# Altium PCB 606-100835.pcbdoc (part 2 of 3)
Units mm, origin at the board's own origin, x right, y up, seen from the top; angles counter-clockwise.
Board outline 27 x 28.35 mm, 6 copper layers (Layer 1, Layer 2, Layer 3, Layer 4, Layer 5, Layer 6), stack 1.518 mm thick; 145 components, 197 nets, 755 pads, 438 vias.
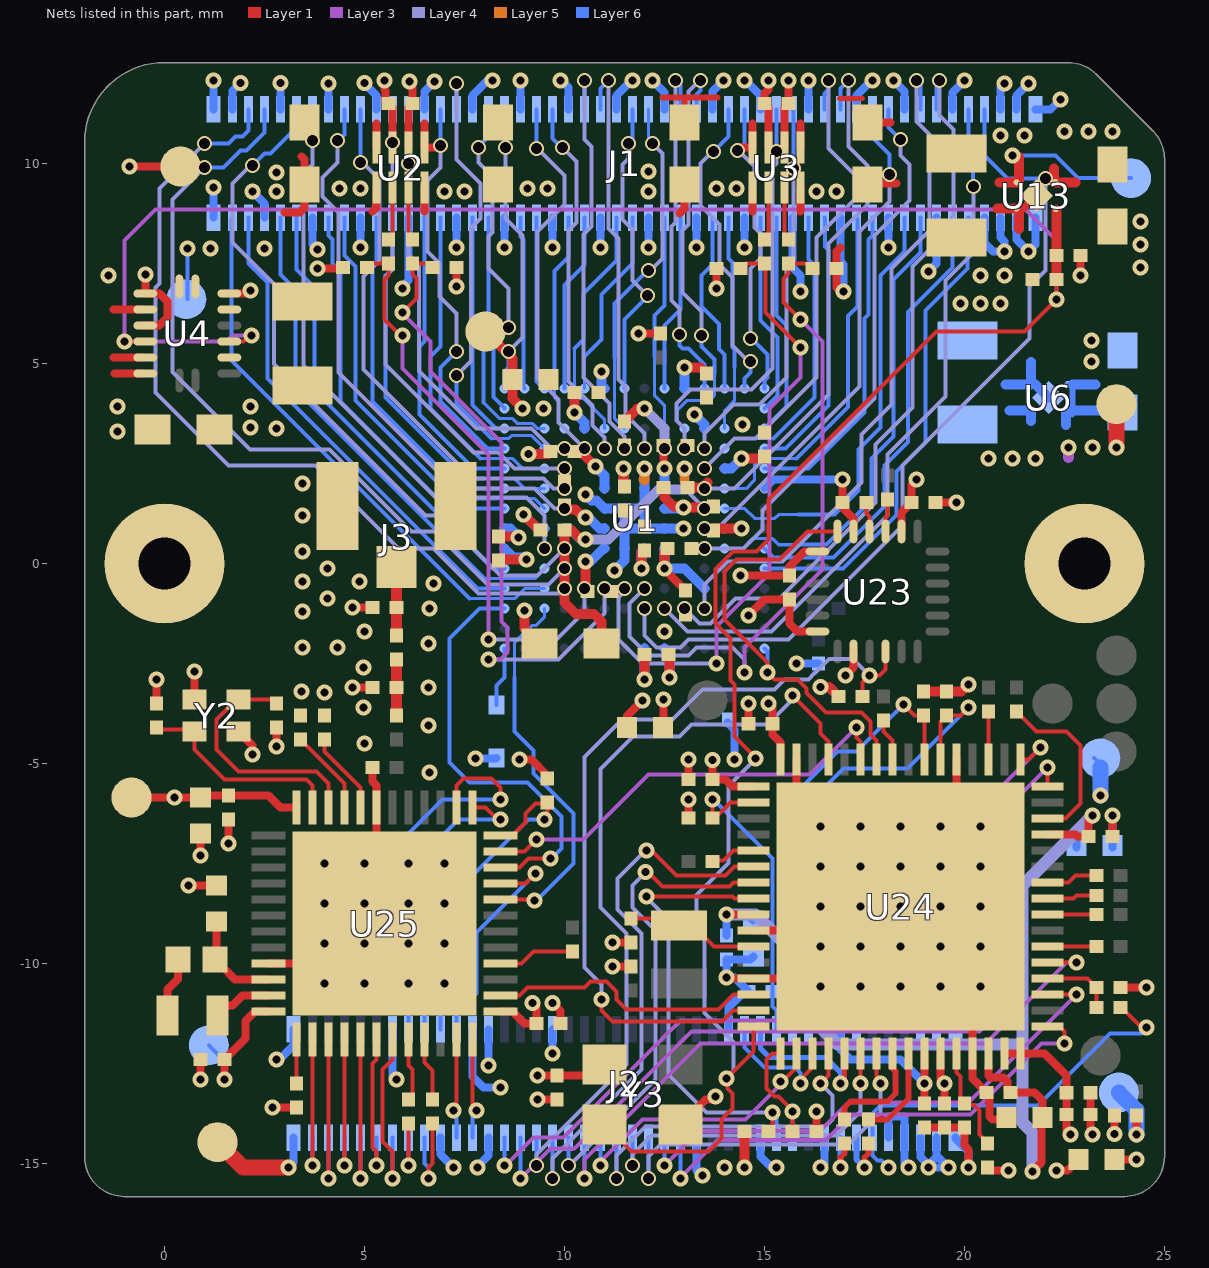
[diagram p6: the nets of this part, all layers, seen from the top]

## Via types
v1: diameter 0.4, hole 0.2, Layer 1 to Layer 6, tented both sides, 358 vias
v2: diameter 0.381, hole 0.279, Layer 4 to Layer 6, tented bottom, 80 vias

## Nets (pads, with @x,y where several pads share a name; then routed paths per layer and width w, separated by ;. In a path a pad name is that pad's centre, name@x,y a point inside that pad or via, vN(x,y) a via of type N, cw(c..) or ccw(c..) an arc to the next point about the centre after c; other vN are vias at no path point) (continued)
GND: C1.1 C2.2 C3.2 C4.2 C5.2 C6.2 C7.2 C8.2 C9.2 C10.2 C11.2 C12.1 C13.2 C14.2 C15.2 C16.2 C17.1 C18.2 C21.1 C37.2 C38.2 C39.2 C40.2 C41.2 C42.2 C45.2 C46.2 C47.2 C48.2 C49.2 C50.2 C51.2 C52.2 C57.2 C74.1 C75.1 C76.2 C77.2 C78.1 C79.1 C80.1 C81.2 C82.1 C83.2 C84.2 C85.1 C86.2 C87.1 C88.2 C89.2 C90.2 C91.2 C92.1 C93.2 C94.1 C95.2 C96.1 C97.2 C98.2 C99.2 C102.2 C103.2 C116.2 C117.2 J1.5 J1.11 J1.17 J1.23 J1.29 J1.35 J1.41 J1.47 J1.53 J1.59 J1.65 J1.71 J1.77 J1.83 J1.89 J1.95 J1.97 J1.98 J1.99 J1.100 J1.101 J1.102 J1.103 J1.104 J2.12 J2.17 J2.23 J2.24 J2.32 J2.49 J2.54 J2.57 J2.65 J2.70 J2.73 J2.75 J2.78 J2.80 J2.81 J2.82 J2.83 J2.84 J3.2 J3.3 M1.1 M2.1 R1.2 R2.2 R3.2 R4.2 R5.2 R12.2 R53.2 R119.2 TP13.1 TP14.1 U1.A9 U1.F1 U1.F7 U1.G7 U1.G8 U1.G9 U1.H6 U1.H7 U1.H8 U1.J8 U1.J14 U1.L3 U1.P6 U2.7 U3.7 U4.2 U4.6 U4.9 U4.11 U6.2 U6.5 U13.2 U13.5 U23.11 U23.18 U23.20 U24.10 U24.13 U24.29 U24.53 U24.63 U24.65 U25.31 U25.45 U25.49 Y2.2 Y2.4 Y3.2 | length 114.2
  Layer 1 w0.1: v1@-0.581,7.225 v1(-0.475,7.225) ; U4.9@-0.48,6.75 U4.9@-0.475,6.755 ; C12.1@12.465,-4.1 C12.1@12.475,-4.09 ; C50.2@19.5,8.35 C50.2@19.75,8.35
  Layer 1 w0.19: v1(5.5,12.075) 5.5,11.85 5.525,11.825 5.525,11.575 C116.2@5.6,11.5 5.7,11.4 U2.7@5.7,10.4 ; U3.7@15.1,10.4 15.1,11.4 C117.2@15,11.5 15,11.75 15.1,11.85 v1(15.1,12.075)
  Layer 1 w0.2: U4.11@-0.575,5.95 U4.11@-0.48,5.95 -0.125,5.95 0.075,6.15 0.075,6.55 -0.125,6.75 U4.9@-0.48,6.75 ; U4.9@-0.475,6.755 v1(-0.475,7.225) ; C103.2@-0.2,-3.5 v1(-0.2,-2.9) ; v1(0.6,-8.05) C90.2@1.3,-8.05 ; Y2.2@0.75,-3.4 v1(0.75,-2.7) ; v1(0.9,-12.9) C94.1@0.9,-12.4 ; v1(0.9,-7.3) C91.2@0.9,-6.75 ; U4.6@1.525,6.75 U4.6@1.62,6.75 2.075,6.75 v1(2.15,6.825) ; v1(1.6,-7) C96.1@1.6,-6.4 ; Y2.4@1.85,-4.2 2.2,-4.55 v1(2.2,-4.775) ; U25.45@2.6,-10 U25.49@3.5,-10 ; v1(2.7,-13.6) C93.2@3.3,-13.6 ; v1(2.8,-4.575) C102.2@2.8,-4.1 ; 3,8.775 3.375,8.775 3.5,8.9 C47.2@3.5,9.475 3.5,10.1 3.425,10.175 ; v1(3.825,7.375) 4.432,7.375 R2.2@4.457,7.4 ; v1(4.7,-3.1) C99.2@5.2,-3.1 ; v1(4.7,-1.1) C57.2@5.2,-1.1 ; C98.2@5.2,-5.1 5.2,-5.45 5.3,-5.55 U25.31@5.3,-6.1 U25.49@5.3,-7.25 ; v1@7.343,6.9 7.3,6.943 7.3,7.357 R3.2@7.343,7.4 ; v1(9.325,-13.4) C45.2@9.811,-13.4 ; v1(9.705,-10.988) 9.9,-11.183 C92.1@9.9,-11.5 ; v1(11.2,-10.075) 11.609,-10.075 11.634,-10.1 C89.2@11.659,-10.075 ; v1(11.2,-9.475) 11.609,-9.475 11.634,-9.5 C88.2@11.659,-9.475 ; v1(11.85,5.75) R1.2@12.4,5.75 ; C12.1@12.475,-4.09 v1(12.475,-3.4) ; 12.875,8.75 13,8.875 C51.2@13,9.475 ; Y3.2@12.906,-14.025 Y3.2@12.956,-13.975 ; Y3.2@12.956,-14.125 Y3.2@12.956,-13.975 ; Y3.2@12.956,-13.969 Y3.2@12.956,-13.975 ; C78.1@13.1,-5.4 v1(13.1,-4.9) ; v1@13.75,-13.3 v1(13.775,-13.325) 13.7,-13.4 13.531,-13.4 Y3.2@12.956,-13.975 ; v1(13.8,6.876) R4.2@13.8,7.375 ; v1(14.05,-10.35) 14.075,-10.375 U24.13@14.725,-10.375 U24.65@15.484,-10.375 ; C85.1@14.599,-4.005 v1(14.599,-3.5) ; v1(14.6,-1.3) 14.999,-0.901 C75.1@15.625,-0.901 15.625,-1.5 15.825,-1.7 U23.18@16.2,-1.7 ; U24.10@14.725,-9.175 U24.65@15.5,-9.175 ; U24.65@15.8,-5.7 U24.63@15.8,-4.9 ; 16.9,7.9 16.8,7.8 R5.2@16.8,7.375 16.8,6.9 16.9,6.8 v1(16.975,6.8) ; v1(16.95,2.1) C76.2@16.95,1.525 16.95,1.4 17.225,1.125 U23.11@17.225,0.8 ; v1(17.025,-2.8) 17.225,-2.6 U23.20@17.225,-2.2 ; C48.2@17.575,9.6 17.675,9.5 18.3,9.5 ; v1(18.4,-8.575) v1(19.4,-9.575) 20.2,-10.375 U24.29@20.2,-12.25 20.2,-12.875 C84.2@20.55,-13.225 20.625,-13.3 20.625,-13.825 20.7,-13.9 C81.2@21,-13.9 ; C87.1@19,-14.1 C79.1@19.5,-14.1 C83.2@20,-14.1 20,-14.55 20.1,-14.65 v1(20.1,-15.1) ; C74.1@19.275,1.525 v1(19.8,1.525) ; U24.65@19.8,-5.6 U24.53@19.8,-4.9 ; C81.2@21.05,-13.85 C81.2@21,-13.9 ; C81.2@21.075,-13.975 C81.2@21,-13.9 ; 21.475,8.875 U13.5@21.8,9.2 ; C82.1@23.15,-13.231 C80.1@23.15,-13.775 23.15,-14.225 v1(23.2,-14.275) ; C86.2@23.7,-6.825 v1(23.7,-6.3) ; C77.2@23.75,-14.899 v1(24.3,-14.899) ; R119.2@23.9,-10.6 v1@24.425,-10.6 ; v1(24.3,-14.275) C18.2@24.3,-13.8
  Layer 1 w0.25: C14.2@8.35,0.075 8.375,0.075 8.4,0.1 v1(9.05,0.1) ; v1(9.1,2.737) 9.587,2.737 C9.2@9.65,2.8 ; v1@10.85,4.775 10.875,4.8 v1(10.925,4.8) ; C4.2@12.6,-2.275 12.625,-2.3 v1(12.625,-2.85) ; C2.2@13.075,1.9 13.45,1.9 13.575,2.025 ; 20.825,8.875 21.365,8.875 21.365,8.365
  Layer 1 w0.4: TP14.1@1.324,-14.466 1.956,-15.099 v1(3.1,-15.099)
  Layer 5 w0.25: 12,2.075 11.975,2.1 12,2.125 v1(12,2.375) ; 13,2.075 v1(13,2.375)
  Layer 6 w0.1: U6.2@21.665,4.475 21.775,4.475
  Layer 6 w0.2: J1.101@1.225,8.645 v1(1.225,9.4) ; J1.102@1.225,11.355 v1(1.225,12.075) ; v1(2.2,9.3) 2.5,9 J1.5@2.5,8.645 ; v1(2.8,-12.4) 2.875,-12.4 3.225,-12.05 J2.82@3.225,-11.645 ; v1(3.1,-15.099) 3.225,-14.974 J2.81@3.225,-14.355 ; J1.11@3.7,8.645 3.7,7.975 v1(3.825,7.85) ; v1(4.9,7.9) J1.17@4.9,8.645 ; J2.12@5.7,-11.645 5.7,-12.8 v1(5.8,-12.9) ; v1(5.95,6.875) 5.95,6.95 5.963,6.937 6.1,7.075 J1.23@6.1,8.645 ; J2.17@6.9,-14.355 6.9,-14.775 v1(7.225,-15.1) ; v1(7.3,7.9) J1.29@7.3,8.645 ; v1(7.825,-15.1) 7.825,-15.075 8.1,-14.8 J2.23@8.1,-14.355 ; v1(8.1,-12.55) J2.24@8.1,-11.645 ; v1(8.5,7.9) J1.35@8.5,8.645 ; v1@8.5,7.95 J1.35@8.5,8.654 ; v1(9.7,-12.25) J2.32@9.7,-11.645 ; v1(9.7,7.9) J1.41@9.7,8.645 ; v1(10.9,7.9) J1.47@10.9,8.645 ; v1(12.1,7.9) J1.53@12.1,8.645 ; J2.49@13.3,-14.355 13.3,-15.175 13.425,-15.3 v1(13.45,-15.3) ; v1(13.3,7.9) J1.59@13.3,8.645 ; J2.54@14.1,-11.645 14.1,-11.1 14.5,-10.7 C52.2@14.6,-10.7 14.25,-10.35 v1(14.05,-10.35) C16.2@14.05,-9.9 14.65,-9.9 C21.1@14.725,-9.825 ; v1(14.5,7.9) J1.65@14.5,8.645 ; J2.57@14.9,-14.355 14.9,-14.825 15.174,-15.099 v1(15.3,-15.099) ; U1.P6@15,1.875 15.225,2.1 v1(16.95,2.1) ; J1.71@15.7,8.645 15.7,7.4 15.9,7.2 v1(15.9,6.8) ; v1(15.8,-2.5) R12.2@16.35,-2.5 ; v1(16.4,-15.099) 16.5,-14.999 J2.65@16.5,-14.355 ; J1.77@16.9,8.645 16.9,7.55 16.975,7.475 v1(16.975,6.8) ; J2.70@17.3,-11.645 17.3,-11 17.4,-10.9 v1(17.4,-10.575) ; J2.73@18.1,-14.355 18.1,-13.83 18.5,-13.83 J2.75@18.5,-14.355 18.5,-15 v1(18.6,-15.1) ; v1(18.1,7.9) J1.83@18.1,8.645 ; J2.78@18.9,-11.645 18.9,-11.2 19,-11.1 19.2,-11.1 ; v1(19.1,7.3) 19.3,7.5 J1.89@19.3,8.645 ; J2.80@19.3,-11.645 19.3,-11.2 19.2,-11.1 ; v1(19.4,-10.575) 19.4,-10.9 19.2,-11.1 ; J2.83@19.775,-14.355 19.775,-14.375 20.1,-14.7 v1(20.1,-15.1) ; J2.84@19.775,-11.645 19.775,-11.2 v1(20.4,-10.575) ; J1.95@20.5,8.645 20.5,8.012 20.712,7.8 v1(21,7.8) 21,8.05 20.9,8.15 J1.97@20.9,8.645 ; J1.98@20.9,11.355 20.9,11.9 v1(21,12) ; J1.99@21.3,8.645 21.3,8.1 v1(21.6,7.8) 21.775,7.975 J1.103@21.775,8.645 ; J1.100@21.3,11.355 21.3,11.7 v1(21.6,12) ; J1.104@21.775,11.355 22.155,11.355 v1(22.4,11.6) ; C17.1@23.7,-7.1 C17.1@23.7,-7.05 v1(23.7,-6.3)
  Layer 6 w0.25: U1.A9@8.5,0.375 8.725,0.15 9,0.15 v1(9.05,0.1) ; v1(10.525,1.725) 10.675,1.575 10.8,1.575 U1.F7@11,1.375 U1.G7@11.5,1.375 ; v1(10.925,4.8) 10.925,4.45 U1.F1@11,4.375 ; v1(11.25,-0.175) 11.5,0.075 U1.G9@11.5,0.375 U1.G8@11.5,0.875 ; U1.G7@11.508,1.384 U1.G7@11.5,1.375 ; v1(12,2.375) U1.H6@12,1.875 U1.H7@12,1.375 ; U1.J14@12.5,-2.125 12.625,-2.25 v1(12.625,-2.85) ; v1(12.975,0.875) U1.J8@12.5,0.875 U1.H8@12,0.875 ; v1(13.25,3.725) 13.5,3.475 U1.L3@13.5,3.375 ; 21.025,4.475 21.665,4.475 21.665,5.035 ; 21.775,4.475 U6.5@22.1,4.15 ; U1.G8@11.5,0.875 U1.G7@11.5,1.375 ; U1.G8@11.5,0.875 U1.H8@12,0.875 ; U1.G7@11.5,1.375 U1.H7@12,1.375 ; U1.H8@12,0.875 U1.H7@12,1.375
  Layer 6 w0.4: TP13.1@23.857,-13.225 24.3,-13.668 v1(24.3,-14.275)
  other v1: 24.55,-10.6 16.4,-10.575 18.4,-10.575 4,-10.5 5,-10.5 6.1,-10.5 7,-10.5 16.4,-9.575 17.4,-9.575 18.4,-9.575 20.4,-9.575 4,-9.5 5,-9.5 6.1,-9.5 7,-9.5 16.4,-8.575 17.4,-8.575 19.4,-8.575 20.4,-8.575 4,-8.5 5,-8.5 6.1,-8.5 7,-8.5 16.4,-7.575 17.4,-7.575 18.4,-7.575 19.4,-7.575 20.4,-7.575 4,-7.5 5,-7.5 6.1,-7.5 7,-7.5 16.4,-6.575 17.4,-6.575 18.4,-6.575 19.4,-6.575 20.4,-6.575 6.625,-5.225 5,-4.5 6.6,-4.05 4.975,-3.6 4,-3.225 3.425,-3.2 6.6,-3.1 4.975,-2.6 3.45,-2.1 4.325,-2.1 6.6,-2 5,-1.7 12.5,-1.7 3.45,-1.2 6.625,-1.125 4.075,-0.875 6.725,-0.5 3.45,-0.45 4.875,-0.45 4.075,-0.125 3.45,0.3 3.45,1.2 3.45,2 2.8,3.375 2.15,3.4 14.45,3.475 9.475,3.875 2.15,3.925 23.175,5.05 23.175,5.575 19.9,6.5 20.4,6.5 20.9,6.5 7.3,6.925 20.4,7.2 21,7.2 24.4,7.4 24.4,7.975 24.4,8.55 2.8,9.3 12.1,9.3 9.075,9.375 9.575,9.375 2.8,9.775 12.1,9.8
GND_PLL: C19.2 C20.2 U1.D8 U1.L7 | length 8.4
  Layer 1 w0.25: v1(10.525,0.6) 10.412,0.6 10.175,0.837 C20.2@10,0.837 10,-0.975 10.288,-1.262 10.737,-1.262 10.925,-1.45 C19.2@10.925,-2
  Layer 4 w0.1: 13.025,1.85 v2(13.5,1.375)
  Layer 4 w0.25: v1(10.525,0.6) 11.1,0.6 12.35,1.85 13.025,1.85
  Layer 6 w0.25: U1.D8@10,0.875 10.125,0.875 10.4,0.6 v1(10.525,0.6)
IMU_INT: U1.P14 U23.12 U24.58 | length 11
  Layer 1 w0.1: U23.12@16.825,0.8 16.071,0.8 15.371,0.1 14.3,0.1 14,-0.2 14,-1.4 14.763,-2.163 15.075,-2.475 v1(15.075,-2.725) 15.25,-2.9 15.825,-2.9 16.05,-3.125 16.05,-3.237 16.538,-3.725 17.42,-3.725 17.65,-3.955 17.65,-4.275 17.8,-4.425 U24.58@17.8,-4.9
  Layer 6 w0.1: U1.P14@15,-2.125 15.075,-2.2 v1(15.075,-2.725)
IMU_NCS: R11.2 U23.22 U24.15 | length 20.4
  Layer 1 w0.1: v1(10.925,-10.9) 10.925,-11.175 11.2,-11.45 13.943,-11.45 14.218,-11.175 U24.15@14.725,-11.175 ; R11.2@17.45,-3.325 17.45,-2.975 v1(17.625,-2.8) 17.875,-2.8 18.025,-2.65 U23.22@18.025,-2.2
  Layer 4 w0.1: v1(10.925,-10.9) 10.925,-10.525 10.5,-10.1 10.5,-4.84 11.44,-3.9 12.7,-3.9 13.45,-3.15 15.25,-3.15 15.5,-2.9 16.097,-2.9 16.255,-2.742 16.258,-2.742 16.612,-2.388 17.213,-2.388 v1(17.625,-2.8)
MCU_GPIO_1: J2.31 U24.6 | length 13.7
  Layer 1 w0.1: v1(12.05,-7.175) 12.175,-7.175 12.8,-7.8 14.025,-7.8 14.25,-7.575 U24.6@14.725,-7.575
  Layer 4 w0.1: v2(9.7,-15.375) 9.7,-14.875 11.92,-12.655 11.92,-9.245 11.325,-8.65 11.325,-7.87 12.02,-7.175 v1(12.05,-7.175)
  Layer 6 w0.1: v2(9.7,-15.375) J2.31@9.7,-14.355
MCU_GPIO_2: J2.33 U24.7 | length 12.2
  Layer 1 w0.1: v1(12.025,-7.712) 12.087,-7.712 12.45,-8.075 14.125,-8.075 14.225,-7.975 U24.7@14.725,-7.975
  Layer 4 w0.1: v2(10.1,-15.05) 10.125,-15.05 12.28,-12.895 12.28,-9.18 11.7,-8.6 11.7,-8.05 12.025,-7.725 v1(12.025,-7.712)
  Layer 6 w0.1: v2(10.1,-15.05) J2.33@10.1,-14.355
MCU_GPIO_3: J2.29 U24.61 | length 19.4
  Layer 1 w0.1: v1(15.7,-3.3) 16.4,-4 16.4,-4.25 16.6,-4.45 U24.61@16.6,-4.9
  Layer 4 w0.1: v2(9.3,-15.05) 9.3,-14.775 11.55,-12.525 11.55,-9.25 10.9,-8.6 10.9,-5.14 11.715,-4.325 12.875,-4.325 13.175,-4.025 15.07,-4.025 15.7,-3.395 v1(15.7,-3.3)
  Layer 6 w0.1: v2(9.3,-15.05) J2.29@9.3,-14.355
MCU_GPIO_4: J2.25 U24.49 | length 22
  Layer 1 w0.1: U24.49@21.4,-4.9 21.6,-4.9 v1(21.9,-4.6)
  Layer 3 w0.1: v1(8.5,-15.05) 8.525,-15.05 9.225,-14.35 9.975,-14.35 12.9,-11.425 20.175,-11.425 21,-10.6 21,-5.5 v1(21.9,-4.6)
  Layer 6 w0.1: v1(8.5,-15.05) J2.25@8.5,-14.355
MCU_GPIO_5: J2.27 U24.48 | length 21.8
  Layer 1 w0.1: U24.48@22.075,-5.575 v1(22.075,-5.1)
  Layer 3 w0.1: v1(8.9,-15.375) 9.65,-14.625 10.25,-14.625 13.175,-11.7 20.375,-11.7 21.4,-10.675 21.4,-5.775 v1(22.075,-5.1)
  Layer 6 w0.1: v1(8.9,-15.375) J2.27@8.9,-14.355
MCU_GPIO_6: J2.41 U24.22 | length 8.6
  Layer 1 w0.1: v1(17.4,-13) U24.22@17.4,-12.25
  Layer 4 w0.1: v2(11.7,-15.05) 11.7,-14.775 12.175,-14.3 16.8,-14.3 17.4,-13.7 v1(17.4,-13)
  Layer 6 w0.1: v2(11.7,-15.05) J2.41@11.7,-14.355
MCU_GPIO_7: J2.37 U24.18 | length 7.1
  Layer 1 w0.1: v1(15.4,-12.95) 15.45,-12.95 15.8,-12.6 U24.18@15.8,-12.25
  Layer 3 w0.1: v1(10.9,-15.05) 10.9,-14.95 11.95,-13.9 14.525,-13.9 15.4,-13.025 v1(15.4,-12.95)
  Layer 6 w0.1: v1(10.9,-15.05) J2.37@10.9,-14.355
MCU_GPIO_8: J2.47 U24.33 | length 12.8
  Layer 1 w0.1: U24.33@22.075,-11.575 22.375,-11.575 22.5,-11.7 v1(22.5,-12)
  Layer 3 w0.1: v1(12.9,-15.375) 12.9,-15.35 13.84,-14.41 16.54,-14.41 17.175,-13.775 20.15,-13.775 21.925,-12 v1(22.5,-12)
  Layer 6 w0.1: v1(12.9,-15.375) J2.47@12.9,-14.355
MCU_GPIO_9: J2.45 U24.35 | length 13.5
  Layer 1 w0.1: U24.35@22.075,-10.775 v1(22.8,-10.775)
  Layer 3 w0.1: v1(12.5,-15.05) 13.36,-14.19 16.385,-14.19 17.1,-13.475 20.1,-13.475 v1(22.8,-10.775)
  Layer 6 w0.1: v1(12.5,-15.05) J2.45@12.5,-14.355
MCU_GPIO_10: J2.43 U24.23 | length 9.3
  Layer 1 w0.1: U24.23@17.8,-12.25 17.8,-12.9 v1(17.9,-13)
  Layer 4 w0.1: v2(12.1,-15.375) 12.1,-14.825 12.4,-14.525 17.1,-14.525 17.9,-13.725 v1(17.9,-13)
  Layer 6 w0.1: v2(12.1,-15.375) J2.43@12.1,-14.355
MCU_GPIO_11: J2.58 U24.21 | length 3.8
  Layer 1 w0.125: v1(16.9,-13) 17,-12.9 U24.21@17,-12.25
  Layer 6 w0.125: J2.58@14.9,-11.645 14.9,-12.125 15.125,-12.35 16.525,-12.35 16.9,-12.725 v1(16.9,-13)
MCU_GPIO_12: J2.39 U24.20 | length 9.2
  Layer 1 w0.1: v1(16.4,-13) 16.6,-12.8 U24.20@16.6,-12.25
  Layer 4 w0.1: v2(11.3,-15.375) 11.3,-14.8 12.025,-14.075 16.525,-14.075 16.7,-13.9 16.7,-13.3 v1(16.4,-13)
  Layer 6 w0.1: v2(11.3,-15.375) J2.39@11.3,-14.355
MCU_GPIO_13: J2.56 U24.19 | length 3.3
  Layer 1 w0.1: v1(15.9,-13) 15.9,-12.9 16.2,-12.6 U24.19@16.2,-12.25
  Layer 6 w0.1: J2.56@14.5,-11.645 14.5,-12.1 15,-12.6 15.769,-12.6 15.9,-12.731 v1(15.9,-13)
MCU_GPIO_14: J2.35 U24.37 | length 16.6
  Layer 1 w0.1: U24.37@22.075,-9.975 v1(22.8,-9.975)
  Layer 3 w0.1: v1(10.5,-15.375) 10.5,-14.9 13.4,-12 20.525,-12 22.55,-9.975 v1(22.8,-9.975)
  Layer 6 w0.1: v1(10.5,-15.375) J2.35@10.5,-14.355
MCU_NRST: C52.1 J2.60 R9.2 U24.2 | length 8.1
  Layer 1 w0.1: v1(13.7,-5.9) R9.2@13.7,-6.365 13.76,-6.365 14.15,-5.975 U24.2@14.725,-5.975
  Layer 6 w0.1: v1(13.7,-5.9) 13.725,-5.9 15.2,-7.375 C52.1@15.2,-10.7 15.2,-11.072 15.3,-11.172 J2.60@15.3,-11.645
MCU_SWCLK: J2.62 R122.2 U24.55 | length 11.4
  Layer 1 w0.1: v1(18.475,-3.525) 18.75,-3.8 R122.2@18.975,-3.8 19,-3.825 U24.55@19,-4.9
  Layer 6 w0.1: J2.62@15.7,-11.645 15.7,-10.9 15.6,-10.8 15.6,-5.925 16.825,-4.7 17.3,-4.7 v1(18.475,-3.525)
MCU_SWDIO: J2.64 R112.2 U24.54 | length 12.6
  Layer 1 w0.1: U24.54@19.4,-4.9 19.4,-3.95 R112.2@19.55,-3.8 19.9,-3.8 v1(20.1,-3.6)
  Layer 6 w0.1: J2.64@16.1,-11.645 16.1,-10.9 15.9,-10.7 15.9,-6.2 16.975,-5.125 18.575,-5.125 v1(20.1,-3.6)
NetC57_1: C57.1 J3.1 L127.2 | length 1.6
  Layer 1 w0.279: L127.2@5.8,-1.8 J3.1@5.8,-0.175
NetC76_1: C76.1 U23.10 | length 0.8
  Layer 1 w0.1: C76.1@17.55,1.525 17.55,1.25 17.625,1.175 U23.10@17.625,0.8
NetC83_1: C83.1 R8.2 U24.28 | length 2.7
  Layer 1 w0.1: U24.28@19.8,-12.25 19.8,-12.725 19.9,-12.825 19.9,-13.431 20,-13.531 20.231,-13.531 20.375,-13.675 20.375,-14.275 R8.2@20.6,-14.5
NetC90_1: C90.1 L3.2 U25.46 | length 2.2
  Layer 1 w0.2: L3.2@1.3,-9.85 C90.1@1.3,-8.95 ; L3.2@1.442,-10.077 1.765,-10.4 U25.46@2.6,-10.4
NetC93_1: C93.1 U25.1 | length 1.1
  Layer 1 w0.1: C93.1@3.3,-13 U25.1@3.3,-11.9
NetC95_1: C95.1 U25.32 | length 2.1
  Layer 1 w0.1: C95.1@4,-4.4 4,-4.7 4.9,-5.6 U25.32@4.9,-6.1
NetC97_1: C97.1 U25.33 | length 2.2
  Layer 1 w0.1: C97.1@3.4,-4.4 4.5,-5.5 U25.33@4.5,-6.1
NetC99_1: C99.1 L5.2 L127.1 | length 1.4
  Layer 1 w0.279: L5.2@5.8,-3.8 L127.1@5.8,-2.4
NetC102_1: C102.1 U25.34 Y2.1 | length 6.3
  Layer 1 w0.1: C102.1@2.8,-3.5 2.7,-3.4 Y2.1@1.85,-3.4 1.8,-3.4 1.3,-3.9 1.3,-4.65 1.85,-5.2 3.8,-5.2 4.1,-5.5 U25.34@4.1,-6.1
NetC103_1: C103.1 U25.35 Y2.3 | length 5.3
  Layer 1 w0.1: C103.1@-0.2,-4.1 -0.15,-4.15 0.7,-4.15 Y2.3@0.75,-4.2 0.75,-4.65 1.5,-5.4 3.55,-5.4 3.7,-5.55 U25.35@3.7,-6.1
NetD1_C: D1.C U1.A14 | length 1.5
  Layer 6 w0.1: D1.C@8.3,-3.54 8.3,-3.05 8.5,-2.85 U1.A14@8.5,-2.125
NetL3_1: L3.1 L4.2 | length 1.5
  Layer 1 w0.2: L4.2@0.075,-11.3 0.075,-10.65 0.335,-10.39 L3.1@0.335,-9.9
NetL4_1: L4.1 U25.47 | length 1.5
  Layer 1 w0.2: L4.1@1.325,-11.3 1.575,-11.05 1.7,-11.05 1.95,-10.8 U25.47@2.6,-10.8
NetR41_2: R41.2 U2.3 | length 1.3
  Layer 1 w0.1: U2.3@6.1,9.4 6.1,8.2 R41.2@6.2,8.1
NetR42_2: R42.2 U2.2 | length 1.3
  Layer 1 w0.1: R42.2@5.6,8.1 5.7,8.2 U2.2@5.7,9.4
NetR43_2: R43.2 U3.3 | length 1.3
  Layer 1 w0.1: U3.3@15.5,9.4 15.5,8.2 R43.2@15.6,8.1
NetR44_2: R44.2 U3.2 | length 1.3
  Layer 1 w0.1: R44.2@15,8.1 15.1,8.2 U3.2@15.1,9.4
NetR111_1: R111.1 U24.5 | length 1.1
  Layer 1 w0.1: R111.1@13.7,-7.45 13.725,-7.425 13.975,-7.425 14.225,-7.175 U24.5@14.725,-7.175
NetR113_2: R113.2 U24.38 | length 1.2
  Layer 1 w0.1: U24.38@22.075,-9.575 R113.2@23.3,-9.575
NetR114_2: R114.2 U24.40 | length 1.2
  Layer 1 w0.1: U24.40@22.075,-8.775 R114.2@23.3,-8.775
NetR115_1: R115.1 U24.42 | length 1.3
  Layer 1 w0.1: U24.42@22.075,-7.975 22.6,-7.975 22.775,-7.8 R115.1@23.3,-7.8
NetR116_1: R116.1 U24.41 | length 1.3
  Layer 1 w0.1: U24.41@22.075,-8.375 22.725,-8.375 22.8,-8.3 R116.1@23.3,-8.3
NetR117_2: R117.2 U24.57 | length 1.1
  Layer 1 w0.1: R117.2@17.975,-3.925 17.975,-4.2 18.2,-4.425 U24.57@18.2,-4.9
NetR120_2: R120.2 U24.46 | length 4.4
  Layer 1 w0.1: R120.2@21.3,-3.7 21.805,-4.205 22.555,-4.205 22.9,-4.55 22.9,-6 22.525,-6.375 U24.46@22.075,-6.375
NetR125_1: R125.1 U24.51 | length 1.2
  Layer 1 w0.1: U24.51@20.6,-4.9 R125.1@20.6,-3.7
NetR128_2: R128.2 U25.16 | length 1.9
  Layer 1 w0.1: U25.16@8.4,-10 8.925,-10 9.225,-9.7 R128.2@10.2,-9.7
NetR129_2: R129.2 U25.8 | length 1.6
  Layer 1 w0.1: R129.2@6.1,-13.4 6.2,-13.3 6.2,-12.65 6.1,-12.55 U25.8@6.1,-11.9
NetR130_2: R130.2 U25.9 | length 1.6
  Layer 1 w0.1: U25.9@6.5,-11.9 6.5,-12.475 6.7,-12.675 R130.2@6.7,-13.4
NetR164_2: R164.2 U23.9 | length 0.8
  Layer 1 w0.1: U23.9@18.025,0.8 18.025,1.15 18.075,1.2 R164.2@18.075,1.6
NFC_N: J2.21 U25.12 | length 2.5
  Layer 1 w0.1: U25.12@7.7,-11.9 7.7,-13.573 v1(7.8,-13.673)
  Layer 6 w0.1: J2.21@7.7,-14.355 7.7,-13.773 v1(7.8,-13.673)
NFC_P: J2.19 U25.11 | length 2.5
  Layer 1 w0.1: v1(7.225,-13.673) 7.3,-13.598 U25.11@7.3,-11.9
  Layer 6 w0.1: v1(7.225,-13.673) 7.3,-13.748 J2.19@7.3,-14.355
NRF_DR: U24.59 U25.23 | length 11
  Layer 1 w0.1: U25.23@8.4,-7.2 9,-7.2 v1(9.3,-6.9) ; v1(17.3,-4.1) 17.3,-4.35 17.4,-4.45 U24.59@17.4,-4.9
  Layer 3 w0.1: v1(9.3,-6.9) 10.475,-6.9 12.1,-5.275 16.125,-5.275 v1(17.3,-4.1)
NRF_FPGA_GPIO_1: U1.A12 U25.22 | length 10.7
  Layer 1 w0.1: U25.22@8.4,-7.6 8.875,-7.6 9.1,-7.375 v1(9.65,-7.375)
  Layer 6 w0.1: U1.A12@8.5,-1.125 7.875,-1.125 7.125,-1.875 7.125,-4.975 7.625,-5.475 9.075,-5.475 9.925,-6.325 9.925,-7.125 9.675,-7.375 v1(9.65,-7.375)
NRF_FPGA_GPIO_2: U1.C12 U25.20 | length 9.6
  Layer 1 w0.1: U25.20@8.4,-8.4 9.225,-8.4 v1(9.25,-8.425)
  Layer 6 w0.083: 8.75,-2.85 8.75,-1.975 9.175,-1.55 9.275,-1.55 9.5,-1.325 U1.C12@9.5,-1.125
  Layer 6 w0.1: 8.75,-2.85 8.75,-4.2 9.225,-4.675 9.225,-5.25 10.225,-6.25 10.225,-7.5 9.325,-8.4 9.275,-8.4 v1(9.25,-8.425)
NRF_NCS: U24.14 U25.14 | length 7
  Layer 1 w0.1: U25.14@8.4,-10.8 8.875,-10.8 9.075,-10.6 10.5,-10.6 10.65,-10.45 11.05,-10.45 11.3,-10.7 11.3,-10.9 11.55,-11.15 13.85,-11.15 14.225,-10.775 U24.14@14.725,-10.775
NRF_NRST: J2.18 R126.2 U25.24 | length 8.7
  Layer 1 w0.1: U25.24@8.4,-6.8 8.7,-6.8 9.025,-6.475 9.025,-6.25 9.275,-6 9.544,-6 R126.2@9.569,-5.975 9.569,-6.419 9.55,-6.4 v1(9.5,-6.4)
  Layer 6 w0.1: J2.18@6.9,-11.645 6.9,-11.175 7.4,-10.675 7.4,-8.1 9.1,-6.4 v1(9.5,-6.4)
NRF_SWDCLK: J2.16 U25.25 | length 7.5
  Layer 1 w0.1: U25.25@7.7,-6.1 8.025,-6.1 8.325,-6.4 v1(8.4,-6.4)
  Layer 6 w0.1: J2.16@6.5,-11.645 6.5,-11.15 6.6,-11.05 6.6,-7.15 7.35,-6.4 v1(8.4,-6.4)
NRF_SWDIO: J2.14 U25.26 | length 10.1
  Layer 1 w0.1: U25.26@7.3,-6.1 7.3,-5.55 7.475,-5.375 8.175,-5.375 8.4,-5.6 v1(8.4,-5.9)
  Layer 6 w0.1: J2.14@6.1,-11.645 6.1,-11.15 5.6,-10.65 5.6,-7.25 6.95,-5.9 v1(8.4,-5.9)
NRF_SWO: J2.20 U25.21 | length 5.7
  Layer 1 w0.1: U25.21@8.4,-8 9.025,-8 v1(9.275,-7.75)
  Layer 6 w0.1: J2.20@7.3,-11.645 7.3,-11.25 7.8,-10.75 7.8,-9.225 v1(9.275,-7.75)
POWER_EN: R53.1 R54.2 U4.3 U4.12 U13.3 U24.16 Y3.1 | length 67.6
  Layer 1 w0.1: v1(-1,5.55) U4.12@-0.48,5.55 ; U4.3@1.62,5.55 1.975,5.55 2.125,5.7 v1(2.175,5.7) v1@2.175,5.575 ; Y3.1@11.006,-14.025 11.681,-14.7 13.6,-14.7 13.925,-14.375 13.925,-13.9 14.2,-13.625 14.2,-13.255 14.075,-13.13 v1@14.075,-13.025 ; v1@14.1,-12.875 v1(14.05,-12.875) 14.725,-12.2 U24.16@14.725,-11.575 ; v1(14.78,-4.88) 14.78,-4.855 14.374,-4.449 14.249,-4.323 14.249,-3.355 14.25,-3.354 14.25,-3.02 14.15,-2.92 14.15,-1.875 13.779,-1.504 13.779,-0.138 14.217,0.3 14.8,0.3 15.1,0.6 15.1,1.6 19.3,5.8 21.5,5.8 v1(22.3,6.6) R53.1@22.3,7.1
  Layer 1 w0.25: R53.1@22.3,7.1 R54.2@22.3,7.7 U13.3@22.3,8.85
  Layer 3 w0.1: v1@2.225,5.725 2.213,5.687 v1@2.175,5.575 ; v1@2.25,5.575 v1@2.175,5.575 ; v1(22.3,6.6) 22.3,8.075 21.525,8.85 -0.225,8.85 -1,8.075 v1(-1,5.55) 1.55,5.55 1.7,5.7 2.05,5.7 v1@2.175,5.575
  Layer 4 w0.1: v1(14.05,-12.875) 14.05,-12.85 14.225,-12.675 14.225,-11.965 13.5,-11.24 13.5,-9.286 13.3,-9.086 13.3,-8.29 14.1,-7.49 14.1,-5.56 14.76,-4.9 v1@14.8,-4.9
RADIO_GPIO_1: J2.1 U25.2 | length 3.9
  Layer 1 w0.1: v1@3.7,-15.099 v1(3.7,-15.05) U25.2@3.7,-11.9
  Layer 6 w0.1: v1(3.7,-15.05) J2.1@3.7,-14.355
RADIO_GPIO_2: J2.3 U25.3 | length 4.5
  Layer 1 w0.1: v1(4.1,-15.375) U25.3@4.1,-11.9
  Layer 6 w0.1: v1(4.1,-15.375) J2.3@4.1,-14.355
RADIO_GPIO_3: J2.5 U25.4 | length 3.8
  Layer 1 w0.1: v1(4.5,-15.05) U25.4@4.5,-11.9
  Layer 6 w0.1: v1(4.5,-15.05) J2.5@4.5,-14.355
RADIO_GPIO_4: J2.7 U25.5 | length 4.5
  Layer 1 w0.1: v1(4.9,-15.375) U25.5@4.9,-11.9
  Layer 6 w0.1: v1(4.9,-15.375) J2.7@4.9,-14.355
RADIO_GPIO_5: J2.9 U25.6 | length 3.9
  Layer 1 w0.1: v1(5.3,-15.05) 5.3,-14.7 5.2,-14.6 5.2,-12.5 5.3,-12.4 U25.6@5.3,-11.9
  Layer 6 w0.1: v1(5.3,-15.05) J2.9@5.3,-14.355
RADIO_GPIO_6: J2.11 U25.7 | length 4.7
  Layer 1 w0.1: v1(5.7,-15.375) 5.7,-14.7 5.45,-14.45 5.45,-12.65 5.7,-12.4 U25.7@5.7,-11.9
  Layer 6 w0.1: v1(5.7,-15.375) J2.11@5.7,-14.355
RADIO_GPIO_7: J2.13 R129.1 | length 1.7
  Layer 1 w0.1: v1(6.1,-15.05) R129.1@6.1,-14
  Layer 6 w0.1: v1(6.1,-15.05) J2.13@6.1,-14.355
RADIO_GPIO_8: J2.15 R130.1 | length 2.5
  Layer 1 w0.1: v1(6.6,-15.375) 6.6,-15.1 6.7,-15 R130.1@6.7,-14
  Layer 6 w0.1: J2.15@6.5,-14.355 6.5,-15 6.6,-15.1 v1(6.6,-15.375)
SCL: J2.59 R110.2 U24.8 | length 11.6
  Layer 1 w0.1: v1(12.05,-8.325) 14.2,-8.325 14.25,-8.375 U24.8@14.725,-8.375 ; R110.2@15.1,-14.2 15.2,-14.1 v1(15.2,-13.725)
  Layer 4 w0.1: v1(12.05,-8.325) 12.05,-8.35 12.6,-8.9 12.6,-12.775 13.55,-13.725 v1(15.2,-13.725)
  Layer 6 w0.1: v1(15.2,-13.725) 15.3,-13.825 J2.59@15.3,-14.355
SDA: J2.61 R109.2 U24.17 | length 3.2
  Layer 1 w0.1: U24.17@15.4,-12.25 15.2,-12.25 15.05,-12.4 15.05,-13.125 15.25,-13.325 15.35,-13.325 15.7,-13.675 v1(15.7,-13.7) R109.2@15.7,-14.2
  Layer 6 w0.1: J2.61@15.7,-14.355 v1(15.7,-13.7)
SENSOR_A1: J1.1 U1.C11 | length 13.9
  Layer 6 w0.083: 7.625,-0.875 8.75,-0.875 9,-0.625 U1.C11@9.5,-0.625
  Layer 6 w0.1: J1.1@1.675,8.62 1.675,5.075 7.625,-0.875
SENSOR_A2: J1.4 U1.D11 | length 20.9
  Layer 4 w0.1: v2(1,10.5) -0.12,9.38 -0.12,7.005 -0.225,6.9 -0.225,4.275 1.6,2.45 3.775,2.45 5.85,0.375 6.725,0.375 7.85,-0.75 9.875,-0.75 v2(10,-0.625)
  Layer 6 w0.1: v2(1,10.5) 1.6,10.5 1.775,10.675 1.95,10.675 2.1,10.825 J1.4@2.1,11.355
SENSOR_A3: J1.7 U1.C10 | length 12.7
  Layer 6 w0.083: 8,-0.375 9.25,-0.375 U1.C10@9.5,-0.125
  Layer 6 w0.1: J1.7@2.9,8.645 2.9,7.225 3.275,6.85 3.275,4.35 8,-0.375
SENSOR_A4: J1.10 U1.D9 | length 17.3
  Layer 4 w0.1: v2(2.2,9.95) 2.15,9.95 1.7,9.5 1.7,8.025 2.74,6.985 2.74,4.985 6.525,1.2 6.9,1.2 8.4,-0.3 9.325,-0.3 v2(10,0.375)
  Layer 6 w0.1: v2(2.2,9.95) 2.5,10.25 2.65,10.25 3.3,10.9 J1.10@3.3,11.355
SENSOR_A5: J1.13 U1.A7 | length 9.9
  Layer 6 w0.1: J1.13@4.1,8.645 4.1,8.2 4.2,8.1 4.2,7.5 4.4,7.3 4.4,4.05 7.075,1.375 U1.A7@8.5,1.375
SENSOR_A6: J1.16 U1.D7 | length 14
  Layer 4 w0.1: v2(4.325,10.575) 4.325,10.025 3.95,9.65 3.95,9.175 4.35,8.775 4.35,4.775 7.25,1.875 9.249,1.875 9.749,1.375 v2(10,1.375)
  Layer 6 w0.1: v2(4.325,10.575) 4.35,10.575 4.5,10.725 J1.16@4.5,11.355
SENSOR_A7: J1.19 U1.A6 | length 8.8
  Layer 6 w0.1: J1.19@5.3,8.645 5.3,7.525 5.2,7.425 5.2,4.05 7.375,1.875 U1.A6@8.5,1.875
SENSOR_A8: J1.22 U1.D5 | length 12
  Layer 4 w0.1: v2(5.7,10.525) 5.7,7.35 5.525,7.175 5.525,4.975 7.725,2.775 8.35,2.775 8.75,2.375 v2(10,2.375)
  Layer 6 w0.1: v2(5.7,10.525) J1.22@5.7,11.355
SENSOR_A9: J1.25 U1.A5 | length 7.7
  Layer 6 w0.1: J1.25@6.5,8.645 6.5,5.55 6.375,5.425 6.375,3.725 7.725,2.375 U1.A5@8.5,2.375
SENSOR_A10: J1.28 U1.A4 | length 10
  Layer 4 w0.1: v2(6.9,10.45) 6.9,9.9 6.575,9.575 6.575,7.8 6.875,7.5 6.875,6.675 7.3,6.25 v2(7.3,5.3)
  Layer 6 w0.1: v2(6.9,10.45) J1.28@6.9,11.355 ; v2(7.3,5.3) 6.9,4.9 6.9,4.05 8.075,2.875 U1.A4@8.5,2.875
SENSOR_A11: J1.31 U1.A3 | length 5.7
  Layer 6 w0.1: J1.31@7.7,8.645 7.7,3.959 8.284,3.375 U1.A3@8.5,3.375
SENSOR_A12: J1.34 U1.A2 | length 8.2
  Layer 4 w0.1: v2(7.85,10.4) 7.85,10.025 8.2,9.675 8.2,8.275 8.1,8.175 8.1,7.375 8.6,6.875 v2(8.6,5.9)
  Layer 6 w0.1: v2(7.85,10.4) 7.85,10.425 8.1,10.675 J1.34@8.1,11.355 ; U1.A2@8.5,3.875 8.5,3.887 8.225,4.162 8.225,5.525 v2(8.6,5.9)
SENSOR_A13: J1.37 U1.B1 | length 4.3
  Layer 6 w0.1: J1.37@8.9,8.645 8.9,8.175 8.975,8.1 8.975,4.4 U1.B1@9,4.375
SENSOR_A14: J1.40 U1.E4 | length 9.6
  Layer 4 w0.1: v2(9.3,10.375) 9.3,10.4 10,9.7 10,8.975 9.325,8.3 9.325,4.625 9.85,4.1 9.85,3.525 v2(10.5,2.875)
  Layer 6 w0.1: v2(9.3,10.375) J1.40@9.3,11.355
SENSOR_A15: J1.43 U1.D3 | length 5.5
  Layer 6 w0.083: 9.75,4.5 9.75,4.271 9.751,4.149 9.85,4.05 9.85,3.525 U1.D3@10,3.375
  Layer 6 w0.1: 9.75,4.5 9.75,7.31 10.1,7.66 J1.43@10.1,8.645
SENSOR_A16: J1.46 U1.G4 | length 10.5
  Layer 4 w0.1: v2(10.5,12.075) 10.5,10.6 10.675,10.425 10.675,8.425 10.475,8.225 10.475,4.65 11.125,4 11.125,3.55 11.5,3.175 v2(11.5,2.875)
  Layer 6 w0.1: J1.46@10.5,11.355 v2(10.5,12.075)
SENSOR_A17: J1.49 U1.F3 | length 6.1
  Layer 6 w0.083: 10.251,4.27 10.251,4.199 10.325,4.125 10.475,4.125 11,3.6 U1.F3@11,3.375 ; 10.25,4.271 10.25,5.149 10.251,5.376
  Layer 6 w0.1: 10.251,5.376 10.47,5.595 10.47,6.745 11.3,7.575 J1.49@11.3,8.645
SENSOR_A18: J1.52 U1.G1 | length 7.6
  Layer 4 w0.1: v2(11.6,10.5) 11.6,10.125 11.45,9.975 11.45,8.6 11.7,8.35 11.7,7.075 v2(12.075,6.7)
  Layer 6 w0.1: U1.G1@11.5,4.375 11.5,6.1 12.075,6.675 v2(12.075,6.7) ; v2(11.6,10.5) 11.7,10.6 J1.52@11.7,11.355
SENSOR_A19: J1.55 U1.J3 | length 5.5
  Layer 6 w0.083: 12.25,4.271 12.25,5.174 ; 12.251,4.27 12.251,4.198 12.5,3.949 U1.J3@12.5,3.375
  Layer 6 w0.1: 12.251,5.175 12.251,6.201 12.5,6.45 J1.55@12.5,8.645
SENSOR_A20: J1.58 U1.L1 | length 8.9
  Layer 4 w0.1: v2(12.775,12.075) 12.775,8.525 12.675,8.425 12.675,6.575 12.875,6.375 v2(12.875,5.725)
  Layer 6 w0.1: v2(12.775,12.075) 12.9,11.95 J1.58@12.9,11.355 ; v2(12.875,5.725) 12.875,5.45 12.95,5.375 13.1,5.375 13.5,4.975 U1.L1@13.5,4.375
SENSOR_A21: J1.61 U1.M1 | length 4.6
  Layer 6 w0.1: J1.61@13.7,8.645 13.7,7.475 13.425,7.2 13.425,6.425 13.863,5.987 13.863,5.362 14,5.225 U1.M1@14,4.375
SENSOR_A22: J1.64 U1.N1 | length 8
  Layer 4 w0.1: v2(13.725,10.3) 13.675,10.3 13.65,10.325 13.688,10.288 13.4,10 13.4,8.95 13.875,8.475 13.875,7.475 14.2,7.15 14.2,5.45 14.6,5.05 v2(14.65,5.05)
  Layer 6 w0.1: v2(13.725,10.3) 14.1,10.675 J1.64@14.1,11.355 ; U1.N1@14.5,4.375 14.5,4.625 14.65,4.775 v2(14.65,5.05)
SENSOR_A23: J1.67 U1.P2 | length 5.1
  Layer 6 w0.1: J1.67@14.9,8.645 14.9,6.075 15.325,5.65 15.325,4.2 U1.P2@15,3.875
SENSOR_A24: J1.70 U1.K4 | length 10.5
  Layer 4 w0.1: v2(13,2.875) 13,3.375 12.8,3.575 12.8,4 13.15,4.35 14.675,4.35 15.2,4.875 15.2,9.9 15.3,10 v2(15.3,10.3)
  Layer 6 w0.1: v2(15.3,10.3) 15.3,10.9 J1.70@15.3,11.355
SENSOR_A25: J1.73 U1.M4 | length 7.3
  Layer 6 w0.083: U1.M4@14,2.875 14.249,3.125 15.225,3.125
  Layer 6 w0.1: 15.225,3.125 16.25,4.15 16.25,7.45 16.1,7.6 J1.73@16.1,8.645
SENSOR_A26: J1.76 U1.L5 | length 12.6
  Layer 4 w0.1: v2(13.5,2.375) 14.25,3.125 14.775,3.125 16.3,4.65 16.3,8.15 17.25,9.1 17.25,9.725 16.6,10.375 v2(16.6,12.075)
  Layer 6 w0.1: J1.76@16.5,11.355 16.5,11.75 16.6,11.85 v2(16.6,12.075)
SENSOR_A27: J1.79 U1.M6 | length 9
  Layer 6 w0.083: U1.M6@14,1.875 14.538,1.875 14.75,2.088 14.75,2.478 14.897,2.625 15.804,2.625
  Layer 6 w0.1: 15.804,2.625 17.09,3.91 17.09,6.19 17.325,6.425 17.325,8.62 J1.79@17.3,8.645
SENSOR_A28: J1.82 U1.L8 | length 12.8
  Layer 4 w0.1: v2(13.5,0.875) 13.825,0.875 17.37,4.42 17.37,8.295 18.125,9.05 v2(18.125,9.725)
  Layer 6 w0.1: J1.82@17.7,11.355 17.7,10.65 18.125,10.225 v2(18.125,9.725)
SENSOR_A29: J1.85 U1.M7 | length 11
  Layer 6 w0.083: U1.M7@14,1.375 14.501,1.375 14.75,1.125 15.251,1.125 15.35,1.225 15.85,1.225
  Layer 6 w0.1: 15.85,1.225 16.75,1.225 17.35,1.825 17.35,2.85 17.9,3.4 17.9,7.2 18.5,7.8 J1.85@18.5,8.645
SENSOR_A30: J1.88 U1.L12 | length 17.2
  Layer 4 w0.1: v2(13.5,-1.125) 13.5,-0.525 14.075,0.05 15.45,0.05 17.425,2.025 17.425,3.225 18.175,3.975 18.175,7.375 19.125,8.325 19.125,10.725 18.8,11.05 v2(18.8,12.075)
  Layer 6 w0.1: v2(18.8,12.075) 18.9,11.975 J1.88@18.9,11.355
SENSOR_A31: J1.91 U1.P9 | length 11.5
  Layer 6 w0.1: U1.P9@15,0.375 15.225,0.15 16.72,0.15 18,1.43 18,2.45 18.59,3.04 18.59,6.29 19.7,7.4 J1.91@19.7,8.645
SENSOR_A32: J1.94 U1.J12 | length 18.1
  Layer 4 w0.1: v2(12.5,-1.125) 13.075,-1.7 15.175,-1.7 18.075,1.2 18.075,2.725 19.52,4.17 19.52,7.07 20.225,7.775 v2(20.225,9.425)
  Layer 6 w0.1: J1.94@20.1,11.355 20.1,9.975 20.212,9.862 20.212,9.437 v2(20.225,9.425)
SENSOR_B1: J1.3 U1.A11 | length 12.3
  Layer 6 w0.1: J1.3@2.1,8.645 2.1,7.5 2.575,7.025 2.575,4.625 7.825,-0.625 U1.A11@8.5,-0.625
SENSOR_B2: J1.6 U1.D10 | length 20.1
  Layer 4 w0.1: v2(1,9.9) 0.2,9.1 0.2,4.79 2.14,2.85 4.125,2.85 6.175,0.8 6.75,0.8 8.075,-0.525 9.6,-0.525 v2(10,-0.125)
  Layer 6 w0.1: v2(1,9.9) 1.475,9.9 1.9,10.325 2.05,10.325 2.5,10.775 J1.6@2.5,11.355
SENSOR_B3: J1.9 U1.A10 | length 11.1
  Layer 6 w0.1: J1.9@3.3,8.645 3.3,7.35 3.75,6.9 3.75,4.325 8.2,-0.125 U1.A10@8.5,-0.125
SENSOR_B4: J1.12 U1.C9 | length 14.9
  Layer 4 w0.1: v2(3.7,10.575) 3.7,9.975 3.475,9.75 3.475,6.95 3.47,6.945 3.47,4.955 6.775,1.65 9.045,1.65 9.5,1.195 v2(9.5,0.375)
  Layer 6 w0.1: v2(3.7,10.575) J1.12@3.7,11.355
SENSOR_B5: J1.15 U1.C7 | length 10.5
  Layer 6 w0.083: 8.3,1.625 8.603,1.625 9.251,1.624 U1.C7@9.5,1.375
  Layer 6 w0.1: J1.15@4.5,8.645 4.5,7.7 4.775,7.425 4.775,4.075 7.225,1.625 8.3,1.625
SENSOR_B6: J1.18 U1.D6 | length 13.1
  Layer 4 w0.1: v2(4.9,10.025) 4.95,10.025 5.375,9.6 5.375,7.575 4.98,7.18 4.98,4.845 7.701,2.125 9.476,2.125 9.725,1.875 v2(10,1.875)
  Layer 6 w0.1: v2(4.9,10.025) 4.9,10.343 J1.18@4.9,11.355
SENSOR_B7: J1.21 U1.C6 | length 9.5
  Layer 6 w0.083: 7.975,2.125 8.75,2.125 9,1.875 U1.C6@9.5,1.875
  Layer 6 w0.1: J1.21@5.7,8.645 5.7,7.375 5.525,7.2 5.525,4.15 7.55,2.125 7.975,2.125
SENSOR_B8: J1.24 U1.D4 | length 11.1
  Layer 4 w0.1: v2(6.1,10) 6.1,7.725 6.36,7.465 6.36,4.815 7.8,3.375 9.175,3.375 9.675,2.875 v2(10,2.875)
  Layer 6 w0.1: v2(6.1,10) J1.24@6.1,11.355
SENSOR_B9: J1.27 U1.C5 | length 8.3
  Layer 6 w0.083: 7.895,2.625 8.7,2.625 8.95,2.375 U1.C5@9.5,2.375
  Layer 6 w0.1: J1.27@6.9,8.645 6.9,5.425 6.65,5.175 6.65,3.87 7.895,2.625
SENSOR_B10: J1.30 U1.C4 | length 12
  Layer 4 w0.1: v2(7.3,4.7) 7.66,5.06 7.66,8.385 7.9,8.625 7.9,9.5 7.3,10.1 v2(7.3,12)
  Layer 6 w0.083: 8.176,3.124 8.396,3.124 8.398,3.125 8.603,3.125 8.678,3.2 9.175,3.2 U1.C4@9.5,2.875
  Layer 6 w0.1: v2(7.3,4.7) 7.3,4 8.176,3.124 ; J1.30@7.3,11.355 7.3,12.1 v2@7.337,12.137
SENSOR_B11: J1.33 U1.C3 | length 6.5
  Layer 6 w0.083: 7.975,4.025 8.375,3.625 8.7,3.625 8.825,3.5 9.2,3.5 9.325,3.375 U1.C3@9.5,3.375
  Layer 6 w0.1: 7.975,4.025 7.975,5.975 8.1,6.1 J1.33@8.1,8.645
SENSOR_B12: J1.36 U1.A1 | length 7.6
  Layer 4 w0.1: v2(8.525,10.4) 8.525,8.625 8.95,8.2 8.95,5.65 v2(8.6,5.3)
  Layer 6 w0.1: U1.A1@8.5,4.375 8.5,4.8 8.6,4.9 v2(8.6,5.3) ; J1.36@8.5,11.355 8.5,10.3 8.525,10.325 v2(8.525,10.4)
SENSOR_B13: J1.39 U1.C1 | length 4.4
  Layer 6 w0.1: J1.39@9.3,8.645 9.3,4.55 9.45,4.4 9.475,4.4 U1.C1@9.5,4.375
SENSOR_B14: J1.42 U1.F4 | length 9.2
  Layer 4 w0.1: v2(9.95,10.4) 10.3,10.05 10.3,8.525 10.1,8.325 10.1,4.55 10.7,3.95 10.7,3.45 11,3.15 v2(11,2.875)
  Layer 6 w0.1: J1.42@9.7,11.355 9.7,10.625 9.95,10.375 v2(9.95,10.4)
SENSOR_B15: J1.45 U1.D1 | length 4.5
  Layer 6 w0.1: U1.D1@10,4.375 10,6.96 10.5,7.46 J1.45@10.5,8.645
SENSOR_B16: J1.48 U1.H4 | length 10.4
  Layer 4 w0.1: v2(11.1,12.075) 11.1,8.375 11.35,8.125 11.35,4.6 11.525,4.425 11.525,3.725 12,3.25 v2(12,2.875)
  Layer 6 w0.1: J1.48@10.9,11.355 10.9,11.875 v2(11.1,12.075)
SENSOR_B17: J1.51 U1.E1 | length 4.8
  Layer 6 w0.083: U1.E1@10.5,4.375 10.5,5.175
  Layer 6 w0.1: 10.5,5.175 10.925,5.6 10.925,6.725 11.7,7.5 J1.51@11.7,8.645
SENSOR_B18: J1.54 U1.G3 | length 9
  Layer 4 w0.1: v2(12.1,7.325) 12.1,7.2 12.063,7.237 12.45,7.625 12.45,10.25 v2(12.2,10.5)
  Layer 6 w0.083: 11.25,5.15 11.25,3.625 U1.G3@11.5,3.375 ; J1.54@12.1,11.355 12.1,10.6 v2(12.2,10.5)
  Layer 6 w0.1: 11.25,5.15 11.25,6.5 12.075,7.325 v2(12.1,7.325)
SENSOR_B19: J1.57 U1.J1 | length 4.4
  Layer 6 w0.1: U1.J1@12.5,4.375 12.5,5.95 12.9,6.35 J1.57@12.9,8.645
SENSOR_B20: J1.60 U1.K3 | length 10.8
  Layer 4 w0.1: v2(13.4,12.075) 13.375,12.075 13.1,11.8 13.1,8.475 12.95,8.325 12.95,6.775 13.425,6.3 v2(13.425,5.7)
  Layer 6 w0.083: U1.K3@13,3.375 12.825,3.55 12.825,3.85 13.05,4.075 13.625,4.075 13.75,4.2 13.75,4.75
  Layer 6 w0.1: J1.60@13.3,11.355 13.3,11.725 13.4,11.825 v2(13.4,12.075) ; v2(13.425,5.7) 13.425,5.425 13.75,5.101 13.75,4.75
SENSOR_B21: J1.63 U1.M3 | length 5.4
  Layer 6 w0.083: U1.M3@14,3.375 14,3.825 14.25,4.075 14.25,4.9
  Layer 6 w0.1: J1.63@14.1,8.645 14.1,7.625 14.2,7.525 14.2,5.4 14.25,5.35 14.25,4.9
SENSOR_B22: J1.66 U1.P1 | length 7.8
  Layer 4 w0.1: v2(14.325,10.325) 14.35,10.325 14.75,9.925 14.75,8.4 14.9,8.25 14.9,7.625 14.65,7.375 v2(14.65,5.625)
  Layer 6 w0.1: v2(14.325,10.325) 14.5,10.5 J1.66@14.5,11.355 ; v2@14.562,5.738 15.075,5.225 15.075,4.65 15,4.575 U1.P1@15,4.375
SENSOR_B23: J1.69 U1.P3 | length 5.6
  Layer 6 w0.1: U1.P3@15,3.375 15.55,3.925 15.55,5.95 15.3,6.2 J1.69@15.3,8.645
SENSOR_B24: J1.72 U1.L4 | length 9.8
  Layer 4 w0.1: v2(13.5,2.875) 13.5,3.25 14.225,3.975 14.875,3.975 15.55,4.65 15.55,7.35 15.725,7.525 v2(15.725,9.875)
  Layer 6 w0.1: J1.72@15.7,11.355 15.725,11.33 v2(15.725,9.875)
SENSOR_B25: J1.75 U1.P4 | length 6.8
  Layer 6 w0.1: U1.P4@15,2.875 15.525,2.875 16.6,3.95 16.6,7.84 16.51,7.93 16.51,8.635 J1.75@16.5,8.645
SENSOR_B26: J1.78 U1.L6 | length 13.3
  Layer 4 w0.1: v2(13.5,1.875) 14.25,1.875 16.6,4.225 16.6,8 17.575,8.975 17.575,9.95 17.1,10.425 v2(17.1,12.075)
  Layer 6 w0.1: J1.78@16.9,11.355 16.9,11.875 v2(17.1,12.075)
SENSOR_B27: J1.81 U1.P5 | length 8
  Layer 6 w0.1: U1.P5@15,2.375 16.1,2.375 17.5,3.775 17.5,6.125 17.6,6.225 17.6,8.1 17.7,8.2 J1.81@17.7,8.645
SENSOR_B28: J1.84 U1.L9 | length 13.9
  Layer 4 w0.1: v2(13.5,0.375) 14.475,0.375 14.95,0.85 14.95,1.325 17.75,4.125 17.75,8.2 18.625,9.075 18.625,9.975 18.4,10.2 v2(18.4,10.6)
  Layer 6 w0.1: J1.84@18.1,11.355 18.1,10.9 v2(18.4,10.6)
SENSOR_B29: J1.87 U1.M9 | length 11.9
  Layer 6 w0.083: U1.M9@14,0.375 14.45,0.375 14.7,0.625 15.2,0.625 15.355,0.47 15.78,0.47
  Layer 6 w0.1: 15.78,0.47 16.55,0.47 17.67,1.59 17.67,2.62 18.23,3.18 18.23,7.105 18.9,7.775 J1.87@18.9,8.645
SENSOR_B30: J1.90 U1.K12 | length 18.4
  Layer 4 w0.1: v2(13,-1.125) 13.375,-1.5 13.65,-1.5 14.275,-0.875 15.375,-0.875 17.775,1.525 17.775,2.975 18.7,3.9 18.7,7.425 19.725,8.45 19.725,10.85 19.375,11.2 v2(19.375,12.075)
  Layer 6 w0.1: J1.90@19.3,11.355 19.3,12 v2(19.375,12.075)
SENSOR_B31: J1.93 U1.P10 | length 12
  Layer 6 w0.1: U1.P10@15,-0.125 16.965,-0.125 18.3,1.21 18.3,2.3 19.03,3.03 19.03,6.325 20.08,7.375 20.08,8.625 J1.93@20.1,8.645
SENSOR_B32: J1.96 U1.H12 | length 21.7
  Layer 4 w0.1: v2(12,-1.125) 12,-1.8 12.3,-2.1 12.9,-2.1 13.1,-1.9 15.6,-1.9 18.45,0.95 18.45,2.45 21.625,5.625 21.625,6.925 22.025,7.325 v2(22.025,9.625)
  Layer 6 w0.1: J1.96@20.5,11.355 20.5,10.2 21.075,9.625 21.975,9.625 22.025,9.675 v2(22.025,9.625)
SENSOR_VCC1: C47.1 J1.2 J1.8 J1.14 J1.20 U2.8 | length 3.4
  Layer 1 w0.19: U2.8@5.3,10.4 5.3,11
  Layer 6 w0.2: J1.2@1.7,11.355 1.7,11.817 v1(1.9,12.017) ; J1.8@2.9,11.355 v1(2.9,12.017) ; J1.14@4.1,11.355 v1(4.1,12) ; v1(5,12.017) 5,12 5.3,11.7 J1.20@5.3,11.355
SENSOR_VCC2: C46.1 J1.26 J1.32 J1.38 J1.44 U2.5 | length 4.3
  Layer 1 w0.19: 6.5,11 U2.5@6.5,10.4 6.8,10.4
  Layer 1 w0.2: v1@6.7,11.975 6.75,12.025 v1(6.75,12.05)
  Layer 6 w0.2: J1.26@6.5,11.355 6.5,11.8 v1(6.75,12.05) ; J1.32@7.7,11.355 7.7,11.7 8.075,12.075 v1(8.2,12.075) ; J1.38@8.9,11.355 v1(8.9,12.075) ; v1(9.9,12.075) 9.925,12.075 10.1,11.9 J1.44@10.1,11.355
SENSOR_VCC3: C51.1 J1.50 J1.56 J1.62 J1.68 U3.8 | length 6.5
  Layer 1 w0.15: 12.45,11.65 13,11.65 ; C51.1@13,11.025 13,11.65 ; 13.825,11.65 13,11.65
  Layer 1 w0.19: 14.3,10.4 U3.8@14.7,10.4 14.7,11
  Layer 6 w0.2: J1.50@11.3,11.355 11.3,11.7 11.675,12.075 v1(11.7,12.075) ; v1(12.2,12.075) 12.5,11.775 J1.56@12.5,11.355 ; J1.62@13.7,11.355 13.7,11.8 v1(13.975,12.075) ; v1(14.5,12.075) 14.525,12.075 14.9,11.7 J1.68@14.9,11.355
SENSOR_VCC4: C48.1 J1.74 J1.80 J1.86 J1.92 U3.5 | length 5
  Layer 1 w0.125: 16.875,11.625 17.45,11.625
  Layer 1 w0.19: U3.5@15.9,10.4 15.9,11
  Layer 1 w0.2: C48.1@17.575,11.025 18.15,11.025
  Layer 6 w0.2: J1.74@16.1,11.355 v1(16.1,12.075) ; J1.80@17.3,11.355 17.3,11.7 17.675,12.075 v1(17.7,12.075) ; v1(18.225,12.075) 18.5,11.8 J1.86@18.5,11.355 ; J1.92@19.7,11.355 19.7,11.775 v1(20,12.075)
SENSOR_VCC_EN1: R2.1 R42.1 U1.E11 | length 14.4
  Layer 1 w0.1: R2.1@5.057,7.4 5.157,7.5 R42.1@5.6,7.5 5.6,7.2 5.5,7.1 5.5,6.1 5.9,5.7 v1(5.95,5.7)
  Layer 3 w0.1: v1(5.95,5.7) 5.95,4.875 8.1,2.725 v1(8.1,-1.9)
  Layer 4 w0.1: v1(8.1,-1.9) 9.8,-1.9 10.5,-1.2 v2(10.5,-0.625)
SENSOR_VCC_EN2: R3.1 R41.1 U1.F11 | length 16.1
  Layer 1 w0.1: v1(5.95,6.275) 6.3,6.625 6.3,7.125 6.2,7.225 R41.1@6.2,7.5 6.643,7.5 R3.1@6.743,7.4
  Layer 3 w0.1: v1(5.95,6.275) 5.95,6.25 6.65,5.55 6.65,4.8 8.425,3.025 8.425,-1.45 8.575,-1.6 8.575,-2.225 8.4,-2.4 v1(8.1,-2.4)
  Layer 4 w0.1: v1(8.1,-2.4) 9.85,-2.4 11,-1.25 v2(11,-0.625)
SENSOR_VCC_EN3: R4.1 R44.1 U1.G11 | length 15.9
  Layer 1 w0.1: R4.1@14.4,7.375 14.525,7.5 R44.1@15,7.5 15.025,7.475 15.025,6.275 v1(15.9,5.4)
  Layer 3 w0.1: v1(13.8,-2.5) 13.8,-1.575 15.125,-0.25 15.125,3.875 15.9,4.65 v1(15.9,5.4)
  Layer 4 w0.1: v2(11.5,-0.625) 11.5,-0.7 11.35,-0.85 11.35,-1.9 11.95,-2.5 v1(13.8,-2.5)
SENSOR_VCC_EN4: R5.1 R43.1 U1.H11 | length 17.1
  Layer 1 w0.1: v1(15.9,6.1) 15.475,6.525 15.475,7.125 15.6,7.25 R43.1@15.6,7.5 16.075,7.5 R5.1@16.2,7.375
  Layer 3 w0.1: v1(14.5,-2.725) 14.5,-2.1 16.45,-0.15 16.45,5.55 v1(15.9,6.1)
  Layer 4 w0.1: v2(12,-0.625) 11.625,-1 11.625,-1.825 12.1,-2.3 13.1,-2.3 13.3,-2.1 14.2,-2.1 14.5,-2.4 v1(14.5,-2.725)
thieving-temp: 
USB_D_N: J2.69 R6.2 | length 1.5
  Layer 1 w0.146: v1(17.5,-15.1) 17.5,-14.85 17.6,-14.75 R6.2@17.6,-14.5
  Layer 6 w0.146: J2.69@17.3,-14.355 17.3,-14.899 17.325,-14.924 ; 17.325,-14.925 v1(17.5,-15.1)
USB_D_P: J2.67 R7.2 | length 1.4
  Layer 1 w0.146: v1(16.9,-15.1) 16.9,-14.85 17,-14.75 R7.2@17,-14.5
  Layer 6 w0.146: v1(16.9,-15.1) J2.67@16.9,-14.355
USB_MCU_D_N: R6.1 U24.25 | length 2.3
  Layer 1 w0.146: R6.1@17.6,-13.9 18.075,-13.9 18.6,-13.375 U24.25@18.6,-12.25
USB_MCU_D_P: R7.1 U24.24 | length 2.7
  Layer 1 w0.146: R7.1@17,-13.9 17,-13.6 17.15,-13.45 18.075,-13.45 18.273,-13.252 18.273,-12.7 18.2,-12.627 U24.24@18.2,-12.25
USB_VBUS: J2.71 R118.2 | length 10
  Layer 1 w0.1: R118.2@23.9,-11.1 23.925,-11.1 24.425,-11.6 v1(24.55,-11.6)
  Layer 6 w0.1: v1(18.1,-15.099) 17.925,-14.924 17.825,-14.924 17.7,-14.799 J2.71@17.7,-14.355 17.7,-13.75 17.9,-13.55 21.833,-13.55 23.633,-11.75 v1@24.425,-11.75
VBUS_IN: R118.1 R119.1 U24.36 | length 1.8
  Layer 1 w0.1: U24.36@22.075,-10.375 23.075,-10.375 R119.1@23.3,-10.6 R118.1@23.3,-11.1
VCC_1V2: C1.2 C2.1 C3.1 C15.1 C37.1 C41.1 C42.1 R16.1 TP7.1 TP10.1 U1.F8 U1.G6 U1.H9 U1.J4 U1.J7 U4.5 U4.7 U4.8 | length 10.9
  Layer 1 w0.25: TP7.1@8.025,5.8 8.7,5.125 C1.2@8.7,4.6 8.7,4.125 v1(8.95,3.875) ; C41.1@10,1.45 10.1,1.35 10.275,1.35 10.475,1.15 v1(10.525,1.15) ; v1(11.475,2.375) 11.475,1.95 C42.1@11.5,1.925 C42.1@11.5,1.875 ; C15.1@11.5,3.55 11.825,3.875 v1(12,3.875) ; v1(11.925,-0.125) 11.925,0.3 C3.1@12,0.375 ; C2.1@12.475,1.925 12.5,1.9 12.5,1.65 12.725,1.425 12.95,1.425 v1(12.975,1.4) 13.65,1.4 R16.1@13.725,1.475
  Layer 4 w0.25: v1(12,3.875) 12.5,3.375 v2(12.5,2.875)
  Layer 6 w0.1: TP10.1@0.575,6.608 v1(0.575,7.875)
  Layer 6 w0.25: v1(10.525,1.15) 10.6,1.15 10.875,0.875 U1.F8@11,0.875 ; v1(11.475,2.375) 11.475,1.9 U1.G6@11.5,1.875 ; v1(11.925,-0.125) 11.925,0.3 U1.H9@12,0.375 ; U1.J7@12.5,1.375 12.95,1.375 v1(12.975,1.4)
  other v1: 1.15,7.875 2.5,7.875
VCC_3V3_CORE: C4.1 C5.1 C6.1 C7.1 C8.1 C9.1 C10.1 C11.1 C12.2 C13.1 C14.1 C40.1 C45.1 C74.2 C75.2 C77.1 C78.2 C79.2 C80.2 C82.2 C85.2 C87.2 C91.1 C92.2 C94.2 C96.2 D1.A J2.22 J2.68 R8.1 R9.1 R11.1 R13.1 R15.1 R109.1 R110.1 R112.1 R122.1 R126.1 TP9.1 TP12.1 U1.A8 U1.E3 U1.F6 U1.F9 U1.H14 U1.J6 U1.J9 U1.K1 U1.L11 U1.M5 U6.1 U23.8 U23.13 U24.1 U24.26 U24.27 U24.31 U24.32 U24.64 U25.13 U25.36 U25.48 Y3.4 | length 50.6
  Layer 1 w0.2: TP9.1@-0.825,-5.85 v1(0.25,-5.85) C91.1@0.9,-5.85 0.95,-5.8 C96.2@1.6,-5.8 2.6,-5.8 2.9,-6.1 U25.36@3.3,-6.1 ; v1(1.5,-12.9) C94.2@1.5,-12.4 2.025,-11.875 2.025,-11.439 2.264,-11.2 U25.48@2.6,-11.2 ; U25.13@8.4,-11.2 8.7,-11.2 9,-11.5 C92.2@9.3,-11.5 9.3,-11.088 v1(9.2,-10.988) ; v1(8.875,-4.9) 9.175,-4.9 9.569,-5.294 R126.1@9.569,-5.375 ; v1(9.325,-12.8) C45.1@9.811,-12.8 10.731,-12.8 10.738,-12.792 10.796,-12.85 11.003,-12.85 Y3.4@11.127,-12.727 ; C12.2@11.565,-4.1 11.565,-3.81 v1(11.95,-3.425) ; C5.1@12.475,2.95 12.475,2.4 v1(12.5,2.375) ; v1@12.5,-0.15 C13.1@13.025,-0.675 ; R9.1@13.1,-6.365 v1(13.1,-5.9) ; v1(13.7,-4.912) C78.2@13.7,-5.4 14.025,-5.4 14.2,-5.575 U24.1@14.725,-5.575 ; v1(14.401,-0.3) 14.65,-0.3 14.651,-0.301 C75.2@15.625,-0.301 15.625,-0.075 16,0.3 U23.13@16.325,0.3 ; v1(15.1,-3.5) 15.199,-3.599 C85.2@15.199,-4.005 15.199,-4.274 15.4,-4.475 U24.64@15.4,-4.9 ; R109.1@16.3,-14.2 v1(16.3,-13.7) ; U23.8@18.425,0.8 18.425,1.275 C74.2@18.675,1.525 18.675,1.975 v1(18.8,2.1) ; C87.2@19,-13.49 v1(19,-13) 19,-12.8 U24.26@19,-12.25 ; U24.27@19.4,-12.25 19.4,-12.9 v1(19.5,-13) C79.2@19.5,-13.5 ; R8.1@20.6,-15.1 20.679,-15.179 v1(21.1,-15.179) ; U24.31@21,-12.25 U24.32@21.4,-12.25 22,-12.25 22.55,-12.8 C82.2@22.55,-13.231 C80.2@22.55,-13.775 22.55,-14.175 v1(22.65,-14.275) ; v1(22.3,-15.175) 22.574,-15.175 C77.1@22.85,-14.899 ; v1(23.75,-14.258) R15.1@23.75,-13.8
  Layer 1 w0.25: C14.1@8.35,0.675 8.85,0.675 v1(8.85,0.65) ; C9.1@10.25,2.8 10.4,2.8 v1(10.775,2.425) ; C10.1@10.25,4.275 10.25,3.776 v1(10.251,3.775) ; v1(10.525,0.05) 10.525,-0.65 C7.1@10.575,-0.7 ; v1(12,-2.9) 12,-2.75 C4.1@12,-2.275 ; v1@12.5,-0.15 v1(12.5,-0.125) 12.5,0.3 C6.1@12.575,0.375 ; v1(13,4.9) 13.4,4.9 C8.1@13.55,4.75 ; v1(14.425,2.625) 14.95,2.625 C11.1@15,2.675 ; v1(14.5,-15.099) R110.1@14.5,-14.2 ; v1(16.4,-3.092) 16.617,-3.092 R11.1@16.85,-3.325 ; R122.1@18.975,-3.2 R112.1@19.55,-3.2 19.925,-3.2 v1(20.1,-3.025)
  Layer 6 w0.1: TP12.1@1.107,-12.046 1.5,-12.439 v1(1.5,-12.9) ; v1@23.731,-14.239 v1(23.75,-14.258)
  Layer 6 w0.2: J2.22@7.7,-11.645 7.7,-12.825 7.975,-13.1 v1(8.4,-13.1) ; v1(7.775,-4.875) 8.285,-4.875 D1.A@8.3,-4.86 ; R13.1@14.075,-3.975 14.25,-4.15 v1(14.25,-4.9) ; J2.68@16.9,-11.645 16.9,-12.15 17.15,-12.4 18.4,-12.4 v1(19,-13)
  Layer 6 w0.25: U1.A8@8.5,0.875 8.65,0.875 8.85,0.675 v1(8.85,0.65) ; v1(10.251,3.775) 10.5,3.526 U1.E3@10.5,3.375 ; v1(10.525,0.05) 10.65,0.05 10.975,0.375 U1.F9@11,0.375 ; v1(10.775,2.425) 11,2.2 U1.F6@11,1.875 ; v1(12,-2.9) U1.H14@12,-2.125 ; U1.J9@12.5,0.375 v1(12.5,-0.125) 13,-0.125 13.025,-0.15 U1.L11@13.5,-0.625 ; U1.J6@12.5,1.875 v1@12.5,2.425 ; U1.K1@13,4.375 v1(13,4.9) ; U1.M5@14,2.375 14.175,2.375 v1(14.425,2.625) ; 21.125,3.825 21.665,3.825 21.665,3.565
  other v1: 14,-15.1 20.6,2.625 21.2,2.625 21.775,2.625
VCC_3V3_SENSORS: C50.1 C116.1 C117.1 TP8.1 TP11.1 U2.1 U2.4 U2.6 U3.1 U3.4 U3.6 U13.1 | length 11.3
  Layer 1 w0.19: v1(-0.878,9.925) 0.2,9.925 TP8.1@0.225,9.95 ; 5.2,8.8 5.3,8.9 U2.1@5.3,9.4 ; U2.6@6.1,10.4 6.1,11.4 C116.1@6.2,11.5 6.2,11.975 v1(6.125,12.05) ; 6.5,8.8 U2.4@6.5,9.4 ; 14.7,8.8 U3.1@14.7,9.4 ; U3.6@15.5,10.4 15.5,11.4 C117.1@15.6,11.5 v1(15.6,12.075) ; 15.9,8.8 U3.4@15.9,9.4
  Layer 1 w0.25: 20.875,9.525 21.365,9.525 v1@21.365,10.165
  Layer 6 w0.1: v1(21.2,10.2) 22.273,10.2 22.838,9.635 TP11.1@24.162,9.635
  other v1: 7,9.3 7.5,9.3 16.3,9.3 16.8,9.3 4.372,9.375 4.9,9.375 13.8,9.375 14.3,9.375 20.9,10.7 21.5,10.7
VCC_3V6: C38.1 C39.1 C49.1 J2.77 J2.79 R54.1 TP15.1 TP16.1 U4.10 U4.13 U4.14 U6.3 U6.4 U13.4 | length 11.7
  Layer 1 w0.1: TP16.1@23.799,3.985 TP16.1@23.8,3.984
  Layer 1 w0.2: -1.275,5.15 U4.13@-0.575,5.15 ; -1.275,6.35 U4.10@-0.575,6.35 ; -1.25,4.75 U4.14@-0.575,4.75 ; v1(22.9,7.2) R54.1@22.9,7.7
  Layer 1 w0.25: 22.235,9.875 22.235,9.525 22.775,9.525
  Layer 1 w0.4: v1(23.8,2.9) TP16.1@23.8,3.984
  Layer 3 w0.28: 22.6,2.65 v1(22.6,2.9)
  Layer 6 w0.1: U6.4@22.535,3.825 22.7,3.825 22.7,3.7 ; U6.3@22.535,4.475 22.7,4.475 ; TP15.1@23.238,-4.856 23.44,-5.058 TP15.1@23.4,-5.098
  Layer 6 w0.15: 22.7,3.825 22.7,4.475
  Layer 6 w0.2: J2.77@18.9,-14.355 18.9,-14.834 v1@19.1,-15.034 ; J2.79@19.3,-14.355 19.3,-14.8 ; v1@19.1,-15.034 19.3,-14.834 19.3,-14.8 ; v1@19.1,-15.034 v1(19.1,-15.1) v1(19.6,-15.1) 19.3,-14.8
  Layer 6 w0.25: 22.535,3.465 U6.4@22.535,3.825 ; 22.7,3.825 C39.1@23.975,3.825 ; 22.7,4.475 23.275,4.475
  Layer 6 w0.4: v1(23.4,-5.8) TP15.1@23.4,-5.098
  other v1: 23.2,2.9 -1.175,3.3 -1.175,3.925 -1.4,7.2 22.5,10.8 23.1,10.8 23.7,10.8
VCC_PLL: C19.1 C20.1 R16.2 U1.C8 U1.M8 | length 3.4
  Layer 1 w0.25: v1(8.975,1.225) 9.363,0.837 C20.1@9.4,0.837 ; v1(9,-1.175) 9,-1.625 C19.1@9.375,-2 ; R16.2@13.725,0.875 v1(14.425,0.875)
  Layer 6 w0.2: U1.M8@14,0.875 v1(14.425,0.875)
  Layer 6 w0.25: v1(8.975,1.225) 9.325,0.875 U1.C8@9.5,0.875
VDDOUT: C16.1 C17.2 C21.2 C81.1 C84.1 C86.1 U24.9 U24.30 U24.45 | length 27.5
  Layer 1 w0.2: v1(14.05,-8.775) U24.9@14.725,-8.775 ; U24.30@20.6,-12.575 20.6,-12.8 20.65,-12.85 20.975,-12.85 21.075,-12.95 21.075,-13.15 C84.1@21.15,-13.225 21.75,-13.225 21.95,-13.425 C81.1@21.95,-13.85 21.925,-13.875 21.925,-14.975 v1(21.7,-15.2) ; U24.45@22.075,-6.775 22.775,-6.775 22.825,-6.825 C86.1@23.1,-6.825 23.1,-6.4 v1(23.2,-6.3)
  Layer 4 w0.3: v1(14.05,-8.775) 14.775,-8.775 15.85,-9.85 15.85,-11.05 16.825,-12.025 21.45,-12.025 ; v1(21.7,-15.2) 21.7,-14.225 21.45,-13.975 21.45,-12.025 ; v1(23.2,-6.3) 21.45,-8.05 21.45,-12.025
  Layer 6 w0.2: C16.1@14.05,-9.3 v1(14.05,-8.775) 14.575,-8.775 C21.2@14.725,-8.925 ; C17.2@22.8,-7.1 C17.2@22.8,-7.05 22.8,-6.675 23.175,-6.3 v1(23.2,-6.3)
XIN: C88.1 U24.11 Y1.1 | length 3.4
  Layer 1 w0.1: C88.1@11.659,-8.875 12.684,-8.875 Y1.1@12.859,-9.05 13.209,-9.05 13.734,-9.575 U24.11@14.725,-9.575